# Altium PCB PCB1.PcbDoc
Units mm, origin at the board's own origin, x right, y up, seen from the top; angles counter-clockwise.
Board outline 16 x 35 mm, 2 copper layers (Top Layer, Bottom Layer); 29 components, 26 nets, 112 pads, 38 vias.
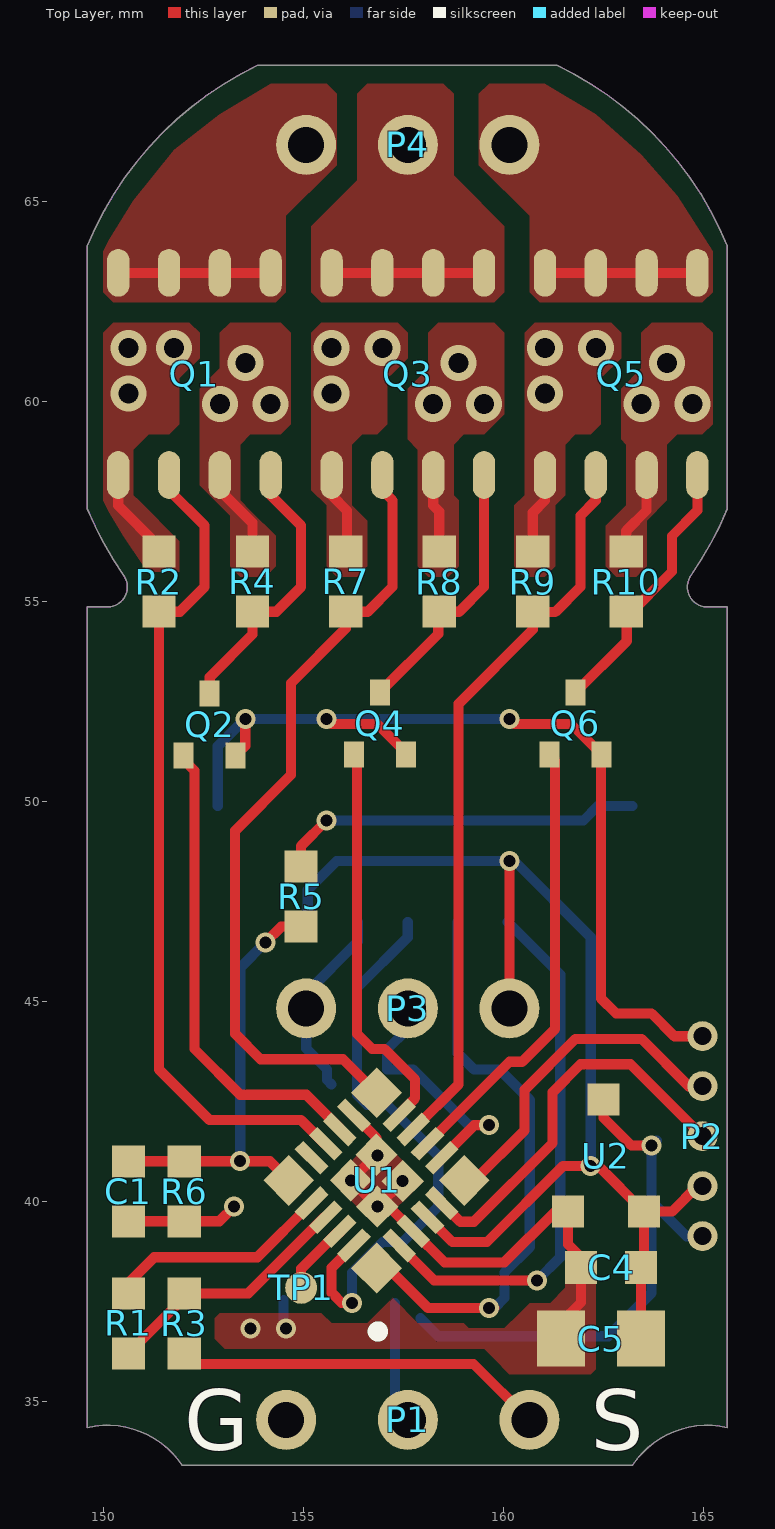
[diagram p0: Top Layer view]
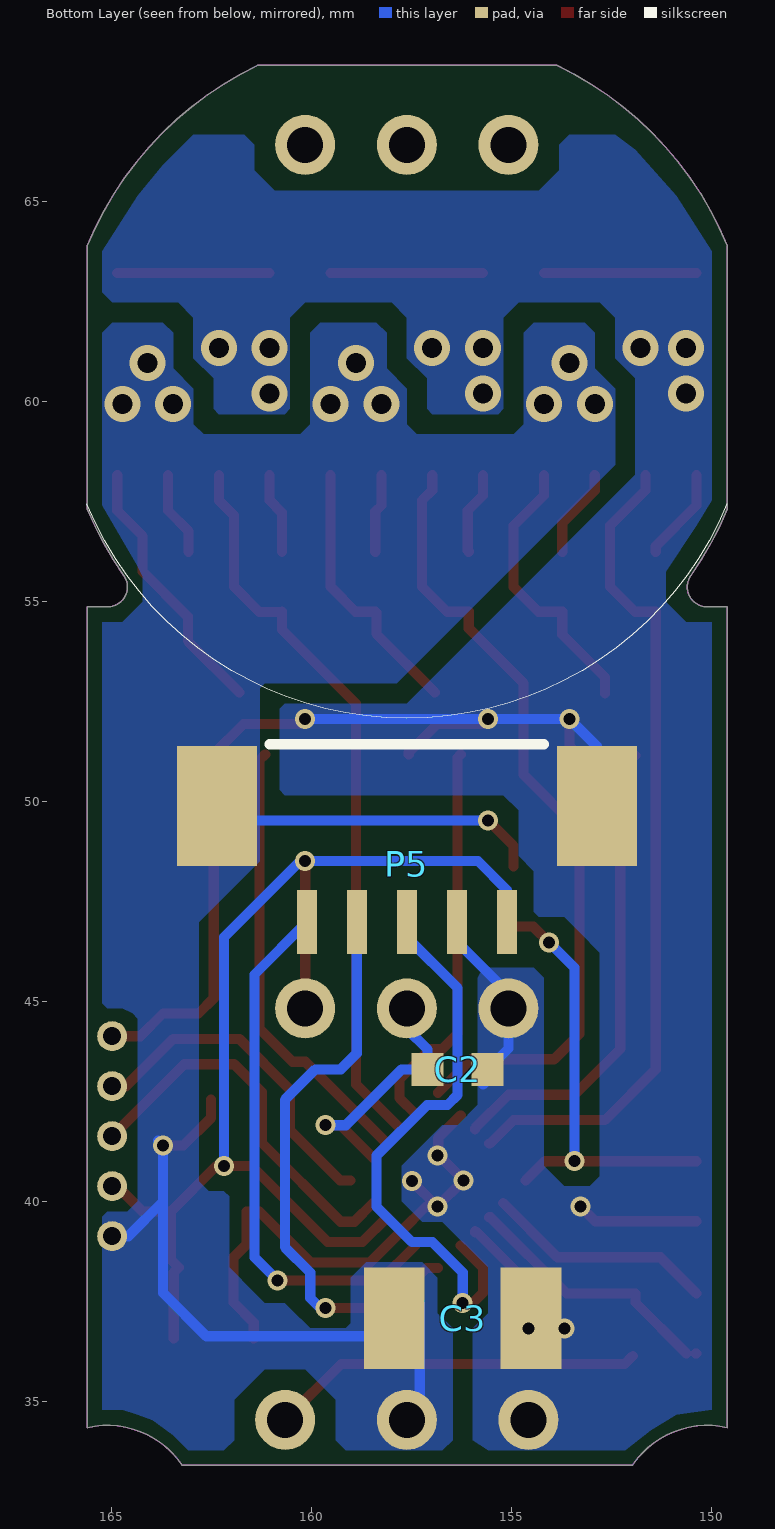
[diagram p1: Bottom Layer view, seen from below]

## Layer stack, top to bottom
Top Solder: solder mask 0.0102, Solder Resist, Dk 3.5
Top Layer: signal copper 0.0356
Dielectric 1: dielectric 0.32, FR-4, Dk 4.8
Bottom Layer: signal copper 0.0356
Bottom Solder: solder mask 0.0102, Solder Resist, Dk 3.5

## Board outline
149.595,34.352 cw(c150.095,32.158) 151.965,33.408 163.224,33.408 cw(c165.095,32.158) 165.595,34.352 165.595,54.866 165.095,54.866 cw(c165.095,55.366) 164.685,55.653 ccw(c157.595,60.608) 165.595,57.318 165.595,63.898 ccw(c157.595,60.608) 161.334,68.408 153.855,68.408 ccw(c157.595,60.608) 149.595,63.898 149.595,57.318 ccw(c157.595,60.608) 150.504,55.653 cw(c150.095,55.366) 150.095,54.866 149.595,54.866

## Design rules (kind name [scope] priority, off if disabled: settings)
Clearance [All] p1: gap=0.2
ComponentClearance [All] p1: gap=0 collisioncheckmode=3 verticalgap=0 showdistances=TRUE
PlaneConnect [All] p1: planeconnectstyle=Direct reliefexpansion=0.508 reliefentries=4 reliefconductorwidth=0.254 reliefairgap=0.254
PolygonConnect [All] p1: connectstyle=Direct reliefconductorwidth=0.254 reliefentries=4 polygonreliefangle="90 Angle" airgapwidth=0.254
RoutingVias [All] p1: holewidth=0.5 width=0.9 viastyle="Through Hole" minholewidth=0.3 minwidth=0.5 maxholewidth=0.5 maxwidth=0.9
SolderMaskExpansion [All] p1: expansion=0.102
Width [All] p1: maxlimit=0.254 minlimit=0.254 preferedwidth=0.254
28 further rules are at their usual default settings.

## Components (designator, comment, footprint, x,y, rotation, side; value= is the part's Value field where it differs from the comment)
C1 "100nF" ZHB_0603 150.622,40.259 r90 top
C2 "100nF" ZHB_0603 156.337,43.307 r0 bottom
C3 "47uF/1210" ZHB_1210 156.21,37.084 r0 bottom
C4 "100nF" ZHB_0603 162.687,38.354 r0 top
C5 "10uF/0805" ZHB_0805 162.433,36.576 r0 top
P1 "SERVO_LINE" Power_com 160.647,34.544 r180 top
P2 "PROG" PRO_5 164.973,39.136 r90 top
P3 "POT" 'CON_3 160.147,44.831 r180 top
P4 "MOTOR" 'CON_3 155.067,66.421 r0 top locked
P5 "HALL" ZHB_125T 160.107,46.99 r180 bottom
Q1 "NCE4606" ZHB_NCE4606 150.368,58.166 r90 top locked
Q2 "DTC114WUA/SOT323" ZHB_DTC114WUA 152.654,51.155 r0 top
Q3 "NCE4606" ZHB_NCE4606 155.702,58.166 r90 top locked
Q4 "DTC114WUA/SOT323" ZHB_DTC114WUA 156.909,51.181 r0 top
Q5 "NCE4606" ZHB_NCE4606 161.036,58.166 r90 top locked
Q6 "DTC114WUA/SOT323" ZHB_DTC114WUA 161.798,51.181 r0 top
R1 "3K3" ZHB_0603 150.622,36.957 r90 top
R2 "3K3" ZHB_0603 151.384,55.499 r270 top
R3 "3K3" ZHB_0603 152.019,36.957 r90 top
R4 "3K3" ZHB_0603 153.721,55.499 r270 top
R5 "10K" ZHB_0603 154.94,47.625 r270 top
R6 "3K3" ZHB_0603 152.019,40.259 r270 top
R7 "3K3" ZHB_0603 156.058,55.499 r270 top
R8 "3K3" ZHB_0603 158.394,55.499 r270 top
R9 "3K3" ZHB_0603 160.731,55.499 r270 top
R10 "3K3" ZHB_0603 163.068,55.499 r270 top
TP1 "PAD" Check_point 154.94,37.846 r90 top
U1 "EFM8BB10F8G" ZHB_EFM8B10F8G 157.038,38.551 r135 top
U2 "ME6209A33/SOT23" ZHB_ME6208 162.56,39.751 r0 top

## Footprints (in the part's own frame and the unit in brackets; to place one, negate y for a bottom-side part, rotate by r counter-clockwise, add the part's x,y. Pads: shape width x height; smd on the part's side, far side on the other; paste and mask are expansions set on the pad)
'CON_3 [mm]
  round 1.5 hole 0.9: 1(0,0) 2(2.54,0) 3(5.08,0)
Check_point [mm]
  round 0.8 smd: 0(0,0)
Power_com [mm]
  round 1.5 hole 0.9: 1(0,0) 2(3.04,0) 3(6.08,0)
PRO_5 [mm]
  round 0.75 hole 0.45: 1(0,0) 2(1.25,0) 3(2.5,0) 4(3.75,0) 5(5,0)
ZHB_125T [mm]
  rect 2x3 smd: 0(-2.25,2.9) 0(7.25,2.9)
  rect 0.5x1.6 smd: 1(0,0) 2(1.25,0) 3(2.5,0) 4(3.75,0) 5(5,0)
ZHB_0603 [mm]
  rect 0.8x0.83 smd: 1(-0.75,0) 2(0.75,0)
ZHB_0805 [mm]
  rect 1.2x1.4 smd: 1(-1,0) 2(1,0)
ZHB_1210 [mm]
  rect 1.52x2.54 smd: 1(-1.71,0) 2(1.71,0)
ZHB_DTC114WUA [mm]
  rect 0.5x0.65 smd: 1(-0.65,0) 2(0.65,0) 3(0,1.55)
ZHB_EFM8B10F8G [mm]
  rect 0.75x0.75 smd: 0(1.075,-0.8) 0(1.075,-1.7) 0(2.005,-1.7) 0(2.005,-0.8)
  rect 0.9x0.9 smd: 1(0,0.3) 6(0,-2.8) 11(3.1,-2.8) 16(3.1,0.3)
  rect 0.9x0.3 smd: 2(0,-0.5) 3(0,-1) 4(0,-1.5) 5(0,-2) 12(3.1,-2) 13(3.1,-1.5) 14(3.1,-1) 15(3.1,-0.5)
  rect 0.3x0.9 smd: 7(0.8,-2.8) 8(1.3,-2.8) 9(1.8,-2.8) 10(2.3,-2.8) 17(2.3,0.3) 18(1.8,0.3) 19(1.3,0.3) 20(0.8,0.3)
  silkscreen extent -1.27,1.27 -1.02,1.52
ZHB_ME6208 [mm]
  rect 0.8x0.8 smd: 1(-0.95,0) 2(0.95,0) 3(-0.061,2.8)
ZHB_NCE4606 [mm]
  oval 1.194x0.559 smd: 1(0,0) 2(0,-1.27) 3(0,-2.54) 4(0,-3.81) 5(5.054,-3.81) 6(5.054,-2.54) 7(5.054,-1.27) 8(5.054,0)

## Part data
C1 C2 C3 C4 C5: library part CAP(SMD)
P1 P3 P4: library part HEAD_3X1_V
P2 P5: library part HEAD_5X1_V
Q1 Q3 Q5: library part FDS8858DS
Q2 Q4 Q6: library part DTC114WUA
R1 R2 R3 R4 R5 R6 R7 R8 R9 R10: library part RES(SMD)
TP1: library part TP
U2: library part ME6209A33

## Via types
v1: diameter 0.5, hole 0.3, Top Layer to Bottom Layer, tented both sides, 20 vias
v2: diameter 0.9, hole 0.5, Top Layer to Bottom Layer, tented both sides, 18 vias

## Nets (pads, with @x,y where several pads share a name; then routed paths per layer and width w, separated by ;. In a path a pad name is that pad's centre, name@x,y a point inside that pad or via, vN(x,y) a via of type N, cw(c..) or ccw(c..) an arc to the next point about the centre after c; other vN are vias at no path point)
+3V3: C4.2 C5.2 P2.2 P3.1 P5.5 U1.4 U2.2 | length 30.3
  Top Layer w0.254: U1.4 158.721,38.989 159.586,38.989 161.491,40.894 v1(162.179,40.894) 162.367,40.894 U2.2 ; P3.1 v1(160.147,48.514) ; C5.2 163.433,38.231 163.31,38.354 163.51,38.554 U2.2 ; P2.2 164.846,40.386 164.211,39.751 U2.2
  Bottom Layer w0.254: P5.5 155.107,47.792 155.829,48.514 v1(160.147,48.514) 160.274,48.514 162.179,46.609 v1(162.179,40.894)
+VBAT: C3.2 P1.2 P2.1 P5.0@162.357,49.89 Q1.3 Q3.3 Q5.3 R4.1 R5.1 R8.1 R10.1 U2.3 | length 32.5
  Top Layer w0.254: Q1.3 152.908,57.785 153.721,56.972 R4.1 ; R5.1 154.94,48.895 v1(155.575,49.53) ; Q3.3 158.242,57.404 158.394,57.252 R8.1 ; U2.3 162.499,42.098 163.195,41.402 v1(163.703,41.402) ; R10.1 163.068,56.769 163.576,57.277 Q5.3
  Bottom Layer w0.254: v1(155.575,49.53) 161.997,49.53 162.357,49.89 P5.0@163.216,49.89 ; C3.2@157.285,37.465 157.285,34.866 P1.2 ; C3.2 158.369,36.635 162.619,36.635 163.703,37.719 163.703,40.005 ; v1@163.83,41.529 v1(163.703,41.402) 163.703,40.005 ; P2.1 164.572,39.136 163.703,40.005
  other v2: 152.908,59.944 154.178,59.944 158.242,59.944 159.512,59.944 163.449,59.944 164.719,59.944 153.543,60.96 158.877,60.96 164.084,60.96
AH: Q2.1 U1.13 | length 12
  Top Layer w0.254: Q2.1@151.892,51.155 152.273,50.774 152.273,43.815 153.416,42.672 155.067,42.672 155.907,41.832 U1.13
AL: Q1.2 R2.2 U1.14 | length 20.9
  Top Layer w0.254: Q1.2 151.638,57.785 152.527,56.896 152.527,55.372 151.904,54.749 R2.2 151.384,43.307 152.654,42.037 154.94,42.037 155.527,41.45 U1.14
BH: Q4.1 U1.10 | length 10
  Top Layer w0.254: Q4.1 156.337,51.103 156.337,44.196 156.718,43.815 157.027,43.815 157.789,43.053 157.789,42.587 157.392,42.19 U1.10
BL: Q3.2 R7.2 U1.11 | length 20.2
  Top Layer w0.254: U1.11 155.988,43.561 153.924,43.561 153.289,44.196 153.289,49.276 154.686,50.673 154.686,52.959 156.058,54.331 R7.2 156.579,54.749 156.591,54.737 157.226,55.372 157.226,57.531 156.972,57.785 Q3.2
CH: Q6.1 U1.8 | length 11.3
  Top Layer w0.254: U1.8 160.147,43.498 160.465,43.498 161.29,44.323 161.29,51.039 Q6.1
CL: Q5.2 R9.2 U1.9 | length 18.6
  Top Layer w0.254: U1.9 158.877,42.935 158.877,52.451 160.731,54.305 R9.2 160.743,54.737 161.29,54.737 161.925,55.372 161.925,57.15 162.306,57.531 Q5.2
GND: C1.1 C2.1 C3.1 C4.1 C5.1 P1.3 P2.5 P3.3 P5.0@152.857,49.89 P5.4 Q1.1 Q2.2 Q3.1 Q4.2 Q5.1 Q6.2 R2.1 R6.2 R7.1 R9.1 U1.0 U1.3 U1.12 U2.1 | length 52.3
  Top Layer w0.254: C1.1@150.368,39.509 C1.1 151.892,39.509 R6.2 152.896,39.509 v1(153.265,39.878) ; Q1.1 150.368,57.404 151.384,56.388 R2.1 ; Q2.2 153.543,51.394 v1(153.543,52.07) ; v1(155.575,52.07) 155.702,51.943 156.845,51.943 157.559,51.229 Q4.2 ; Q3.1 155.702,57.658 156.083,57.277 156.083,56.274 R7.1 ; U1.12 156.822,41.595 156.822,41.171 v1(156.186,40.534) U1.0@156.844,39.877 ; v1(157.48,40.513) U1.0@156.844,39.877 ; v1(160.147,52.07) 160.274,51.943 161.686,51.943 Q6.2 ; R9.1 160.731,57.226 161.036,57.531 Q5.1 ; C5.1 161.433,36.973 161.937,37.477 C4.1 161.937,38.608 161.61,38.935 U2.1 161.29,39.751 160.02,38.481 158.522,38.481 U1.3 157.126,39.877 U1.0@156.844,39.877 ; Q6.2@162.433,51.181 162.433,45.085 162.814,44.704 163.703,44.704 164.271,44.136 P2.5
  Bottom Layer w0.254: P5.0@152.857,49.89 152.857,51.384 v1(153.543,52.07) v1(155.575,52.07) v1(160.147,52.07) ; C3.1 C3.1@154.5,37.533 ; C2.1@155.702,42.926 155.587,43.041 C2.1 155.067,43.827 P3.3 155.067,45.212 156.357,46.502 P5.4
  other v1: 153.67,36.83 154.559,36.83 156.845,39.878 156.845,41.148
  other v2: 150.622,60.198 155.702,60.198 161.036,60.198 150.622,61.341 151.765,61.341 155.702,61.341 156.972,61.341 161.036,61.341 162.306,61.341
HA: P5.1 U1.2 | length 13.6
  Top Layer w0.254: U1.2 158.269,38.027 v1(160.836,38.027)
  Bottom Layer w0.254: P5.1 161.417,45.68 161.417,38.608 v1(160.836,38.027)
HB: P5.2 U1.1 | length 14.6
  Top Layer w0.254: U1.1 157.114,38.339 158.115,37.338 v1(159.639,37.338) v1@159.766,37.338
  Bottom Layer w0.254: P5.2 158.857,43.708 159.258,43.307 159.893,43.307 160.655,42.545 160.655,38.862 160.02,38.227 160.02,37.592 159.766,37.338 v1(159.639,37.338)
HC: P5.3 U1.20 | length 14.4
  Top Layer w0.254: v1(156.21,37.465) 155.956,37.465 155.702,37.719 155.702,38.346 U1.20
  Bottom Layer w0.254: v1(156.21,37.465) 156.21,38.227 156.972,38.989 157.48,38.989 158.369,39.878 158.369,41.148 157.099,42.418 156.591,42.418 156.337,42.672 156.337,45.339 157.607,46.609 P5.3
NetP1_1: P1.1 R3.1 | length 9.4
  Top Layer w0.254: R3.1@151.956,36.144 152.158,35.941 159.25,35.941 P1.1
NetP2_3: P2.3 U1.5 | length 9.8
  Top Layer w0.254: U1.5 158.92,39.497 159.258,39.497 161.226,41.465 161.226,42.735 161.925,43.434 163.175,43.434 P2.3
NetP2_4: P2.4 U1.6 | length 8.5
  Top Layer w0.254: U1.6 159.276,40.531 160.528,41.783 160.528,42.799 161.798,44.069 163.449,44.069 164.632,42.886 P2.4
NetQ1_4: Q1.4 Q2.3 R4.2 | length 7.1
  Top Layer w0.254: Q2.3 152.654,53.112 153.721,54.179 R4.2 154.317,54.749 154.94,55.372 154.94,56.896 154.178,57.658 Q1.4
NetQ3_4: Q3.4 Q4.3 R8.2 | length 6.8
  Top Layer w0.254: Q4.3 158.369,54.191 158.369,54.724 R8.2 158.889,54.749 159.512,55.372 Q3.4
NetQ5_4: Q5.4 Q6.3 R10.2 | length 6.7
  Top Layer w0.254: Q6.3 163.08,54.013 163.08,54.622 164.211,55.753 164.211,56.642 164.846,57.277 Q5.4
NetR1_1: R1.1 R3.2 U1.18 | length 6.5
  Top Layer w0.254: R1.1@150.368,36.207 R1.1@150.392,36.207 ; R1.1 151.892,37.477 151.892,37.707 R3.2 153.616,37.707 155.521,39.611 U1.18
NetR1_2: R1.2 U1.17 | length 5.8
  Top Layer w0.254: R1.2@150.368,37.707 151.269,38.608 153.843,38.608 U1.17
NetTP1_1: TP1.0 U1.19 | length 1.9
  Top Layer w0.254: TP1.0 154.94,38.324 155.842,39.225 155.907,39.225 U1.19
PH_A: P4.1 Q1.5 Q1.6 Q1.7 Q1.8 | length 3.8
  Top Layer w0.254: Q1.8 Q1.7 Q1.6 Q1.5
PH_B: P4.2 Q3.5 Q3.6 Q3.7 Q3.8 | length 3.8
  Top Layer w0.254: Q3.8 Q3.7 Q3.6 Q3.5
PH_C: P4.3 Q5.5 Q5.6 Q5.7 Q5.8 | length 3.8
  Top Layer w0.254: Q5.8 Q5.7 Q5.6 Q5.5
VBAT: C1.2 R5.2 R6.1 U1.16 | length 11.2
  Top Layer w0.254: C1.2@150.368,41.009 C1.2 R6.1 154.156,41.009 U1.16 ; v1(154.051,46.482) 154.444,46.875 R5.2
  Bottom Layer w0.254: v1(153.416,41.021) 153.416,45.847 v1(154.051,46.482)
VPOT: C2.2 P3.2 U1.7 | length 6.4
  Top Layer w0.254: U1.7 159.266,41.91 v1(159.639,41.91)
  Bottom Layer w0.254: P3.2 157.607,44.323 157.087,43.803 C2.2 157.734,43.307 159.131,41.91 v1(159.639,41.91)
pads on no net: U1.15

## Polygon pours and split planes (outlines as drawn)
GND on Top Layer "GND" (solid, pour order 38): 152.908,37.211 152.781,37.084 152.781,36.576 153.035,36.322 159.512,36.322 159.766,36.068 160.147,35.687 161.29,35.687 162.179,35.687 162.306,35.814 162.306,37.338 162.306,37.973 161.544,37.973 161.544,38.481 161.544,37.846 161.163,37.465 160.655,37.465 160.401,37.211 160.02,36.83 159.131,36.83 159.004,36.957 157.861,36.957 157.226,37.592 156.845,37.211 156.591,36.957 155.575,36.957 155.702,36.957 155.448,37.211 153.162,37.211
+VBAT on Top Layer "+VBAT" (solid, pour order 24): 163.449,61.722 163.449,60.96 163.449,60.833 162.941,60.325 162.941,59.182 162.941,59.055 163.068,58.928 163.068,57.531 163.068,57.404 162.56,56.896 162.56,55.88 162.814,55.626 163.322,55.626 163.576,55.88 163.576,56.896 163.576,57.023 164.084,57.531 164.084,58.928 164.338,59.182 164.973,59.182 165.227,59.436 165.227,61.722 164.973,61.976 163.703,61.976
+VBAT on Top Layer "+VBAT" (solid, pour order 22): 158.115,61.722 158.115,61.087 158.115,60.96 158.115,60.833 157.607,60.325 157.607,59.436 157.607,59.182 157.607,59.055 157.861,58.801 157.861,55.88 158.115,55.626 158.623,55.626 158.75,55.753 158.877,55.88 158.877,57.531 158.75,57.658 158.75,58.928 159.004,59.182 159.512,59.182 159.893,59.563 160.02,59.69 160.02,61.722 159.766,61.976 158.369,61.976
GND on Top Layer "GND" (solid, pour order 20): 160.782,61.976 160.528,61.722 160.528,57.658 160.274,57.404 160.274,55.88 160.528,55.626 161.036,55.626 161.29,55.88 161.29,57.404 161.544,57.658 161.544,58.928 161.798,59.182 162.052,59.182 162.179,59.182 162.433,59.436 162.433,60.579 162.941,61.087 162.941,61.722 162.687,61.976
GND on Top Layer "GND" (solid, pour order 18): 155.448,61.976 155.194,61.722 155.194,57.785 155.575,57.404 155.575,55.88 155.829,55.626 156.337,55.626 156.591,55.88 156.591,56.642 156.591,57.023 156.21,57.404 156.21,57.531 156.21,58.928 156.337,59.055 156.464,59.182 156.845,59.182 156.972,59.309 157.099,59.436 157.099,60.579 157.226,60.706 157.607,61.087 157.607,61.722 157.353,61.976
+VBAT on Top Layer "+VBAT" (solid, pour order 16): 153.162,61.976 152.908,61.722 152.908,60.96 152.908,60.833 152.4,60.325 152.4,57.912 152.527,57.785 152.654,57.658 153.162,57.15 153.162,55.88 153.416,55.626 154.051,55.626 154.305,55.88 154.305,56.642 153.67,57.277 153.416,57.531 153.416,58.928 153.67,59.182 154.432,59.182 154.686,59.436 154.686,61.722 154.432,61.976
GND on Top Layer "GND" (solid, pour order 14): 150.241,61.976 149.987,61.722 149.987,57.531 150.114,57.277 150.495,56.642 151.003,55.88 151.13,55.753 151.892,55.753 151.892,56.515 150.876,57.531 150.749,57.658 150.749,58.801 151.13,59.182 151.638,59.182 151.892,59.436 151.892,60.579 152.4,61.087 152.4,61.722 152.146,61.976
PH_C on Top Layer "PHC" (solid, pour order 10): 159.639,67.945 159.385,67.691 159.385,65.913 160.655,64.643 160.655,62.738 160.909,62.484 165.1,62.484 164.973,62.484 165.227,62.738 165.227,63.754 164.338,65.151 163.449,66.167 162.306,67.183 161.036,67.945
PH_B on Top Layer "PHB" (solid, pour order 8): 156.591,67.945 156.337,67.691 156.337,65.913 156.337,65.786 156.337,65.532 155.194,64.389 155.194,62.738 155.448,62.484 159.766,62.484 160.02,62.738 160.02,64.389 158.877,65.532 158.75,65.659 158.75,67.691 158.496,67.945
PH_A on Top Layer "PHA" (solid, pour order 6): 154.305,62.484 150.241,62.484 149.987,62.738 149.987,63.754 150.114,64.008 150.749,65.024 151.765,66.294 152.908,67.183 154.178,67.945 154.305,67.945 155.575,67.945 155.829,67.691 155.829,67.564 155.829,65.913 155.702,65.786 154.559,64.643 154.559,64.516 154.559,62.738
GND on Top Layer "GND" (solid, pour order 40): 156.845,39.37 157.988,40.513 156.972,41.529 156.906,41.595 156.822,41.595 156.784,41.595 155.702,40.513
GND on Bottom Layer "GND" (solid, pour order 36): 155.956,34.036 155.575,33.782 152.146,33.782 151.511,34.29 150.876,34.671 149.987,34.798 149.987,54.483 154.94,54.483 155.575,54.483 157.607,52.451 157.861,52.451 160.655,52.451 160.782,52.324 160.782,50.292 160.655,50.165 155.321,50.165 155.194,50.165 154.813,49.784 154.813,49.53 154.813,48.641 154.432,48.26 154.432,47.244 154.305,47.117 153.797,47.117 153.67,47.117 153.289,46.736 152.781,46.228 152.781,44.831 152.781,41.402 152.781,40.64 153.035,40.386 153.67,40.386 154.178,40.894 154.178,45.593 154.432,45.847 155.702,45.847 155.829,45.593 155.829,42.418 156.337,41.91 156.718,41.91 157.734,40.894 157.734,40.005 157.226,39.497 156.718,39.497 155.575,38.354 155.575,37.211 155.956,36.83
+VBAT on Bottom Layer "+VBAT" (solid, pour order 34): 156.464,34.671 156.464,34.036 156.718,33.782 159.131,33.782 159.385,34.036 159.385,35.052 160.147,35.814 161.163,35.814 161.925,35.052 161.925,34.036 162.179,33.782 163.068,33.782 163.449,34.163 163.825,34.434 163.964,34.534 164.338,34.671 164.719,34.798 165.227,34.798 165.227,39.624 165.1,39.751 164.592,39.751 164.338,40.005 164.338,41.021 164.338,42.291 164.338,43.815 164.338,44.577 164.465,44.704 164.719,44.831 165.1,44.831 165.227,44.958 165.227,54.102 165.227,54.483 163.068,54.483 161.29,52.959 161.29,49.784 161.29,48.514 162.814,46.99 162.814,40.513 162.56,40.259 162.179,40.259 162.052,40.132 162.052,38.989 162.052,38.354 161.417,37.719 161.163,37.465 161.29,37.465 160.655,37.465 160.528,37.338 160.02,36.83 159.131,36.83 159.004,36.957 159.004,38.1 158.623,38.481 157.226,38.481 156.845,38.1 156.845,37.211 156.464,36.83
GND on Bottom Layer "GND" (solid, pour order 32): 162.941,66.675 163.703,65.913 164.338,65.151 165.227,63.754 165.227,62.738 164.973,62.484 163.322,62.484 163.195,62.357 162.941,62.103 162.941,61.087 162.433,60.579 162.433,59.817 162.306,59.69 160.655,59.69 160.528,59.817 160.528,62.103 160.147,62.484 158.369,62.484 158.242,62.484 157.988,62.484 157.607,62.103 157.607,61.087 157.099,60.579 157.099,59.817 156.972,59.69 155.321,59.69 155.194,59.817 155.194,62.103 154.813,62.484 152.781,62.484 152.4,62.103 152.4,61.087 151.892,60.579 151.892,59.436 151.892,58.166 155.829,54.229 152.654,54.292 152.908,54.229 150.495,54.356 151.13,54.991 151.13,55.753 150.368,56.896 149.987,57.531 149.987,63.754 150.876,65.151 151.892,66.294 152.4,66.675 153.543,66.675 153.797,66.421 153.797,65.786 154.309,65.274 160.905,65.274 161.417,65.786 161.417,66.421 161.671,66.675
+VBAT on Bottom Layer "+VBAT" (solid, pour order 30): 164.973,61.976 165.227,61.722 165.227,57.404 164.338,55.88 164.211,55.626 164.211,55.499 164.211,54.991 164.592,54.61 164.719,54.483 164.846,54.356 165.1,54.356 165.1,53.213 164.846,52.959 161.29,52.832 161.163,52.959 157.861,52.959 152.4,58.42 152.4,58.547 152.4,59.309 152.4,60.325 152.908,60.833 152.908,61.722 153.162,61.976 154.432,61.976 154.686,61.722 154.686,59.436 154.94,59.182 155.067,59.182 157.353,59.182 157.607,59.436 157.607,60.325 158.115,60.833 158.115,61.722 158.369,61.976 159.766,61.976 160.02,61.722 160.02,59.436 160.274,59.182 162.687,59.182 162.941,59.436 162.941,60.325 163.449,60.833 163.449,61.722 163.703,61.976 164.973,61.976 165.227,61.722

## Keep-outs
Keep-Out Layer:
  lines w0.013: 149.595,34.352 cw(c150.095,32.158) 151.965,33.408 163.224,33.408 cw(c165.095,32.158) 165.595,34.352 165.595,54.866 165.095,54.866 cw(c165.095,55.366) 164.685,55.653 ccw(c157.595,60.608) 165.595,57.318 165.595,63.898 ccw(c157.595,60.608) 161.334,68.408 153.855,68.408 ccw(c157.595,60.608) 149.595,63.898 149.595,57.318 ccw(c157.595,60.608) 150.504,55.653 cw(c150.095,55.366) 150.095,54.866 149.595,54.866 149.595,53.908 149.595,34.352

## Silkscreen, mask and mechanical layers (free items; w line width, h text height)
Top Overlay:
  text "G" at 152.019,33.782 h1.52
  text "S" at 162.179,33.782 h1.52
Bottom Overlay:
  lines w0.013: 149.605,57.445 ccw(c157.605,60.735) 165.605,57.445
  lines w0.254: 154.178,51.435 161.036,51.435